# EAGLE board SHIELD_L293D (EAGLE 7.6.0)
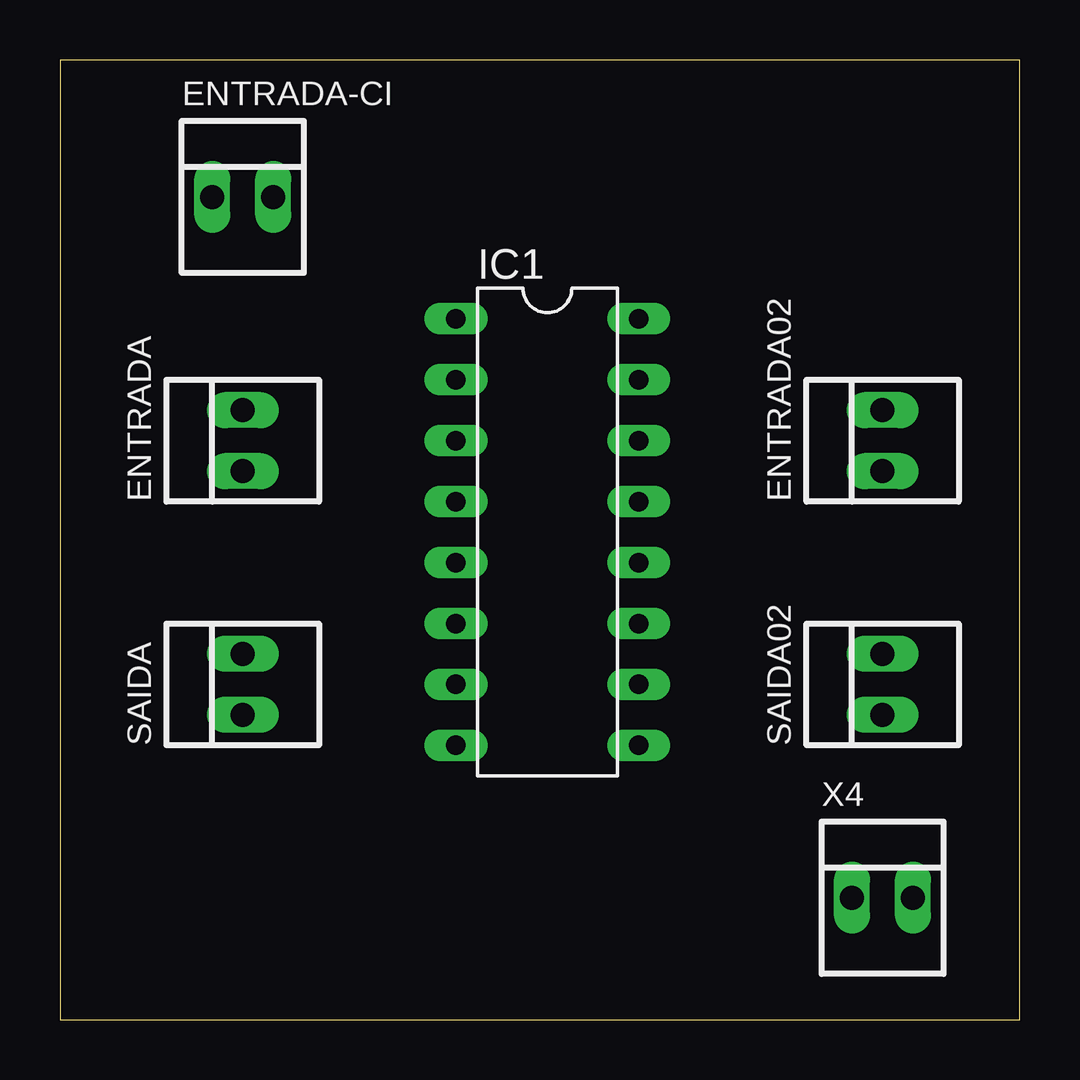
[diagram p0: board, top side]
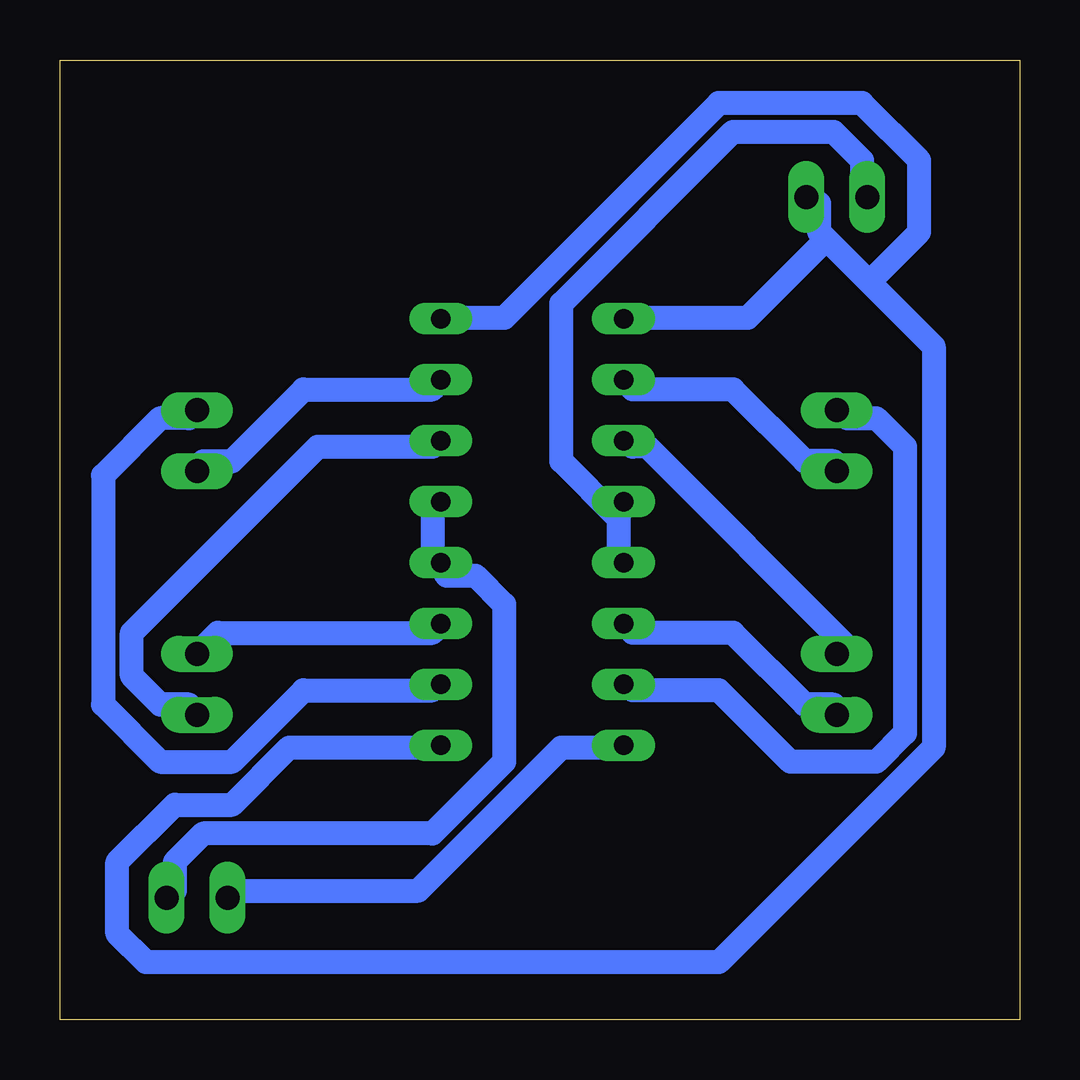
[diagram p1: board, bottom side, seen from below]

Size 40 x 40 mm. Coordinates in mm from the lower left corner, seen from the top.
Outline: 0,0 40,0 40,40 0,40 0,0
Copper layers (1*16): Top 0.035mm / dielectric 1.5mm / Bottom 0.035mm
Design rules "default *": minimum track width 39mil, minimum drill 24mil, track to track 8mil, track to pad 8mil, pad to pad 8mil, via to via 8mil, smd to smd 8mil, copper to edge 40mil, drill to drill 8mil, minimum pad ring 10mil, minimum via ring 8mil, stop-mask expansion 4mil, vias tented up to drill 0mil, thermal gap 10mil

## Footprints (pad centres in the part's own frame; a part is rotated, then mirrored left to right if it is on the bottom)
22-23-2021 = drill 1 long: 1 -1.27,0; 2 1.27,0
DIL16 = drill 0.813 long: 1 -8.89,-3.81; 2 -6.35,-3.81; 3 -3.81,-3.81; 4 -1.27,-3.81; 5 1.27,-3.81; 6 3.81,-3.81; 7 6.35,-3.81; 8 8.89,-3.81; 9 8.89,3.81; 10 6.35,3.81; 11 3.81,3.81; 12 1.27,3.81; 13 -1.27,3.81; 14 -3.81,3.81; 15 -6.35,3.81; 16 -8.89,3.81

## Placement (x,y rotation side)
ENTRADA  22-23-2021  [22-23-2021]  7.62,24.13 90 top
ENTRADA02  22-23-2021  [22-23-2021]  34.29,24.13 90 top
ENTRADA-CI  22-23-2021  [22-23-2021]  7.62,34.29 0 top
IC1  L293D  [DIL16]  20.32,20.32 270 top
SAIDA  22-23-2021  [22-23-2021]  7.62,13.97 90 top
SAIDA02  22-23-2021  [22-23-2021]  34.29,13.97 90 top
X4  22-23-2021  [22-23-2021]  34.29,5.08 0 top

## Library data of the parts
ENTRADA ENTRADA02 ENTRADA-CI SAIDA SAIDA02 X4 = con-molex; MF: MOLEX; MPN: 22-23-2021; OC_FARNELL: 1462926; OC_NEWARK: 25C3832
IC1 = st-microelectronics; MPN: L293D; OC_FARNELL: 9589619; OC_NEWARK: 56P8249

## Nets
N$1: ENTRADA.1 IC1.2
N$2: ENTRADA.2 IC1.7
N$3: ENTRADA-CI.1 IC1.4 IC1.5
N$4: IC1.3 SAIDA.2
N$5: IC1.6 SAIDA.1
N$6: ENTRADA-CI.2 IC1.1 IC1.9 IC1.16
N$7: ENTRADA02.1 IC1.15
N$8: IC1.12 IC1.13 X4.2
N$9: IC1.8 X4.1
N$10: ENTRADA02.2 IC1.10
N$11: IC1.14 SAIDA02.1
N$12: IC1.11 SAIDA02.2

## Tracks (layer width: path | path; a pad name or v marks a point on that pad's centre or on a via)
N$1
  Bottom 0.991: IC1.2 16.12,26.26 11.94,26.26 8.95,23.28 7.76,23.28 ENTRADA.1
N$2
  Bottom 0.991: IC1.7 16.12,13.73 12.54,13.73 9.55,10.74 5.97,10.74 4.78,11.94 4.78,23.88 5.97,25.07 7.16,25.07 ENTRADA.2
N$3
  Bottom 0.991: 16.71,20.89 16.71,21.49 IC1.4 16.71,20.89 | 16.71,20.89 16.71,19.1 IC1.5 | 16.71,20.89 19.1,23.28 19.1,29.84 11.94,37.01 7.76,37.01 6.57,35.81 6.57,34.62 ENTRADA-CI.1
N$4
  Bottom 0.991: IC1.3 16.12,23.88 15.52,23.88 7.16,15.52 SAIDA.2
N$5
  Bottom 0.991: IC1.6 16.12,16.12 11.94,16.12 8.95,13.13 7.76,13.13 SAIDA.1
N$6
  Bottom 0.991: 8.06,32.53 8.36,32.83 8.36,34.02 ENTRADA-CI.2 | 8.06,32.53 6.27,30.74 | 6.27,30.74 3.58,28.05 3.58,11.34 12.54,2.39 36.41,2.39 37.6,3.58 37.6,6.57 35.22,8.95 32.83,8.95 30.44,11.34 24.47,11.34 IC1.9 | 8.06,32.53 11.34,29.25 16.12,29.25 IC1.1 | 6.27,30.74 4.18,32.83 4.18,35.81 6.57,38.2 12.54,38.2 21.49,29.25 23.88,29.25 IC1.16
N$7
  Bottom 0.991: IC1.15 24.47,26.26 29.84,26.26 32.83,23.28 34.02,23.28 ENTRADA02.1
N$8
  Bottom 0.991: IC1.13 24.47,21.49 24.47,19.1 IC1.12 23.88,18.5 22.68,18.5 21.49,17.31 21.49,10.74 24.47,7.76 34.02,7.76 35.22,6.57 35.22,5.37 X4.2
N$9
  Bottom 0.991: IC1.8 16.71,11.34 19.1,11.34 25.07,5.37 32.83,5.37 X4.1
N$10
  Bottom 0.991: IC1.10 24.47,13.73 29.84,13.73 32.83,10.74 35.81,10.74 38.2,13.13 38.2,22.68 35.81,25.07 34.62,25.07 ENTRADA02.2
N$11
  Bottom 0.991: IC1.14 24.47,23.88 29.25,23.88 37.01,16.12 37.01,14.33 35.81,13.13 34.62,13.13 SAIDA02.1
N$12
  Bottom 0.991: IC1.11 24.47,16.12 33.43,16.12 34.02,15.52 SAIDA02.2